# EAGLE board 555-pwm-eagle (EAGLE 5.07)
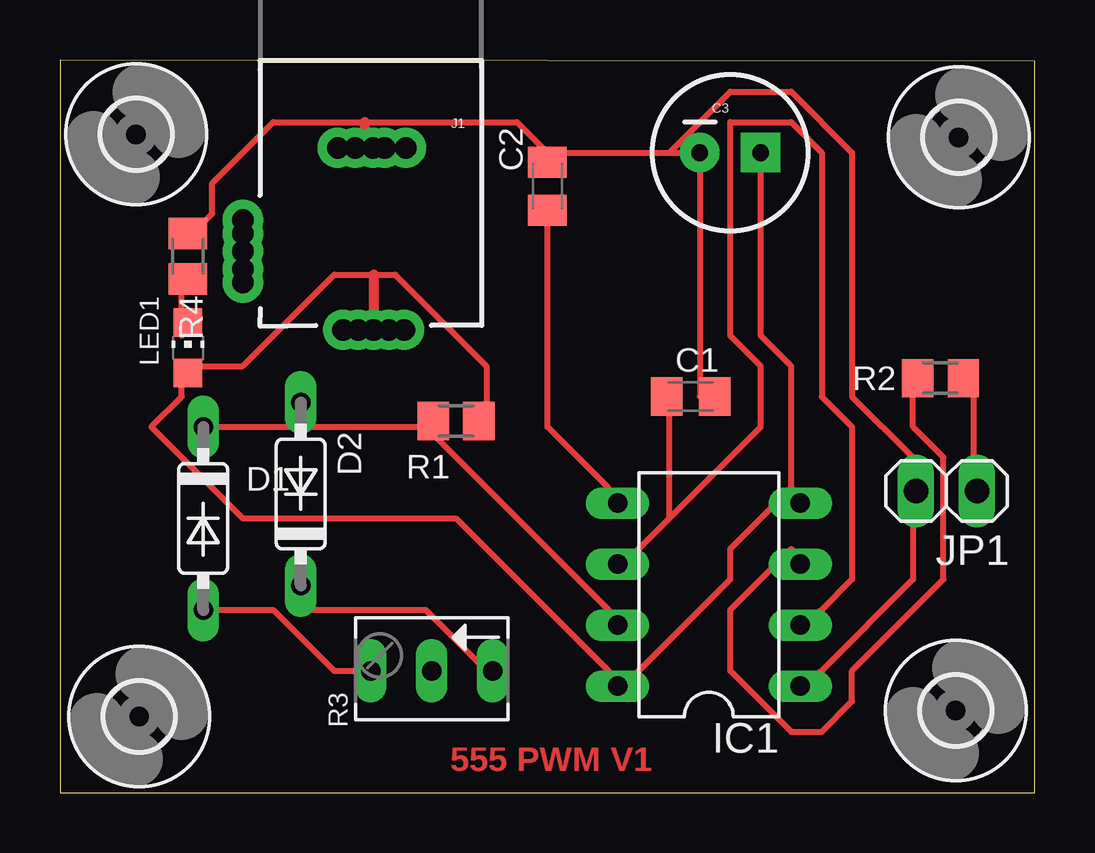
[diagram p0: board, top side]
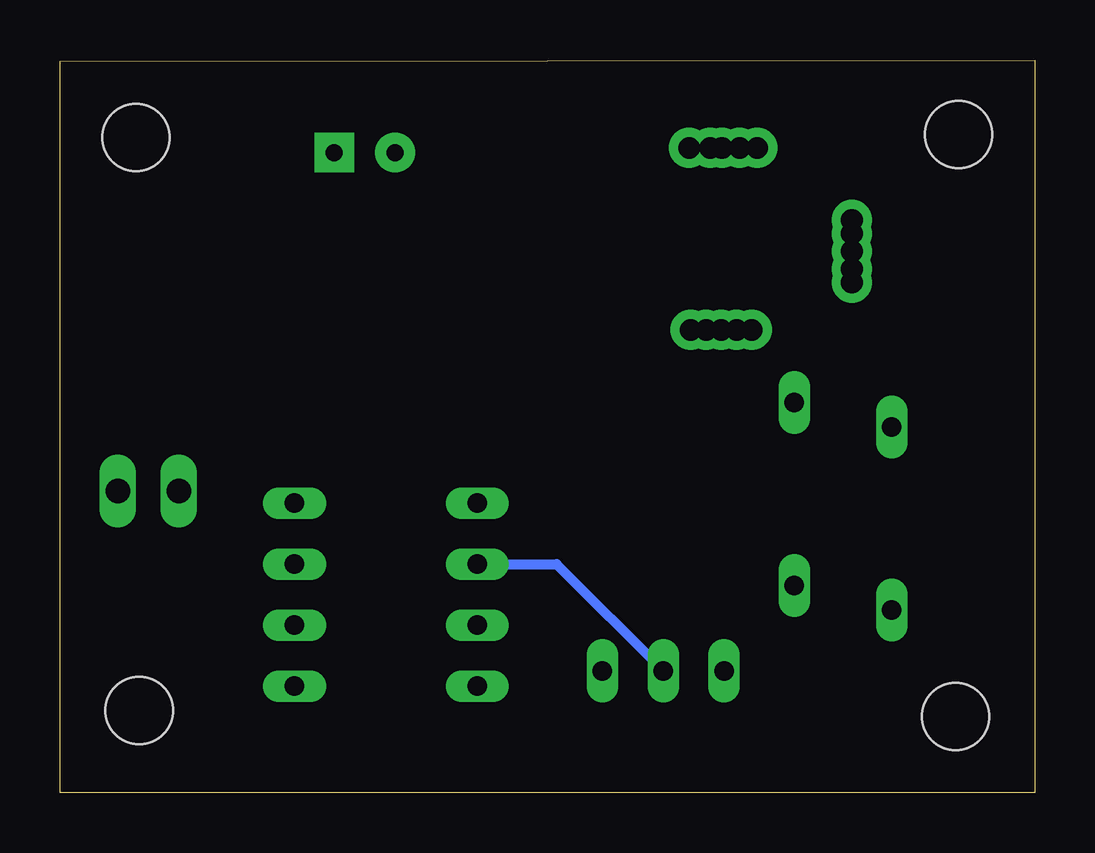
[diagram p1: board, bottom side, seen from below]

Size 40.64 x 30.53 mm. Coordinates in mm from the lower left corner, seen from the top.
Outline: 0,0 40.64,0 40.64,30.48 0,30.53 0,0
Copper layers (1*16): Top 0.035mm / dielectric 1.5mm / Bottom 0.035mm
Design rules "digital-toy": minimum track width 10mil, minimum drill 24mil, track to track 10mil, track to pad 10mil, pad to pad 10mil, via to via 10mil, smd to smd 10mil, copper to edge 40mil, drill to drill 10mil, minimum pad ring 10mil, minimum via ring 10mil, stop-mask expansion 4mil, vias tented up to drill 0mil, thermal gap 10mil

## Footprints (pad centres in the part's own frame; a part is rotated, then mirrored left to right if it is on the bottom)
C0805K = smd 1.3 x 1.6: 1 -1,0; 2 1,0
CPOL-RADIAL-100UF-25V = drill 0.7 pad 1.651 square: 1 1.27,0 | drill 0.7 pad 1.651 round: 2 -1.27,0
DO35-7 = drill 0.813 long: A 3.81,0; C -3.81,0
2,8 = hole 2.8: 0,0
DIL-08 = drill 0.813 long: 1 -3.81,-3.81; 2 -1.27,-3.81; 3 1.27,-3.81; 4 3.81,-3.81; 5 3.81,3.81; 6 1.27,3.81; 7 -1.27,3.81; 8 -3.81,3.81
POWER_JACK_2.1X5.5MM_BIG = drill 0.9 pad 1.676 round: $1GND -0.093,6.785; $1GND1 -0.578,6.785; $1GND2 -1.463,6.785; $1GND3 0.642,6.785; $1GND4 1.377,6.785; $1GNDBREAK 5.325,11.094; $1GNDBREAK1 5.325,11.829; $1GNDBREAK2 5.325,12.394; $1GNDBREAK3 5.325,10.359; $1GNDBREAK4 5.325,9.794; $2PWR -0.12,14.369; $2PWR1 -0.755,14.369; $2PWR2 -1.39,14.369; $2PWR6 0.515,14.369; $2PWR7 1.15,14.369 | drill 0.9 round: $2PWR3 0.515,14.369; $2PWR4 0.515,14.369; $2PWR5 0.515,14.369
1X02 = drill 1.016 long: 1 -1.27,0; 2 1.27,0
CHIP-LED0805 = smd 1.2 x 1.2: A 0,-1.05; C 0,1.05
M0805 = smd 1.3 x 1.6: 1 -0.95,0; 2 0.95,0
B64Y = drill 0.813 long: A 2.54,0; E -2.54,0; S 0,0

## Placement (x,y rotation side)
C1  0.1  [C0805K]  26.29,16.51 0 top
C2  0.01  [C0805K]  20.32,25.27 90 top
C3  470uf  [CPOL-RADIAL-100UF-25V]  27.94,26.67 0 top
D1  1N4148DO35-7  [DO35-7]  5.97,11.43 270 top
D2  1N4148DO35-7  [DO35-7]  10.03,12.45 90 top
H1  MOUNT-HOLE2.8  [2,8]  37.47,27.3 0 top
H2  MOUNT-HOLE2.8  [2,8]  3.3,3.17 0 top
H3  MOUNT-HOLE2.8  [2,8]  3.17,27.43 0 top
H4  MOUNT-HOLE2.8  [2,8]  37.34,3.43 0 top
IC1  NE555  [DIL-08]  27.05,8.26 90 top
J1  POWER_JACKPTH_SLOT  [POWER_JACK_2.1X5.5MM_BIG]  12.95,33.66 180 top
JP1  PWM  [1X02]  36.96,12.57 180 top
LED1  RED  [CHIP-LED0805]  5.33,18.54 0 top
R1  1k  [M0805]  16.51,15.49 180 top
R2  1k  [M0805]  36.7,17.27 0 top
R3  50k  [B64Y]  15.49,5.08 180 top
R4  500  [M0805]  5.33,22.35 270 top

## Library data of the parts
C1 C2 R1 R2 R4 = rcl
C3 = SparkFun
D1 D2 = diode
H1-H4 = holes
IC1 = st-microelectronics
J1 = digital-toy
JP1 = pinhead
LED1 = led
R3 = pot

## Nets
GND: C1.2 C2.2 C3.2 IC1.1 J1.$1GND JP1.2 R4.1
N$1: C1.1 IC1.2 IC1.6 R3.S
N$2: D1.C D2.A IC1.7 R1.2
N$4: LED1.C R4.2
N$5: JP1.1 R2.2
N$6: C2.1 IC1.5
N$7: D1.A R3.A
N$8: IC1.3 R2.1
N$9: D2.C R3.E
VCC+: C3.1 IC1.4 IC1.8 J1.$2PWR LED1.A R1.1

## Tracks (layer width: path | path; a pad name or v marks a point on that pad's centre or on a via)
GND
  Top 0.254: IC1.1 31.75,5.08 35.56,8.89 35.56,11.43 JP1.2 35.56,12.7 35.56,13.97 33.02,16.51 33.02,26.67 30.48,29.21 27.94,29.21 25.4,26.67 | C1.2 26.67,16.51 C3.2 25.4,26.67 | 20.32,26.67 19.05,27.94 12.7,27.94 8.89,27.94 6.35,25.4 6.35,24.13 5.08,22.86 R4.1 | 20.32,26.67 25.4,26.67 | 20.32,26.67 C2.2
  Top 0.406: J1.$1GND 12.7,26.52 12.7,27.94
N$1
  Top 0.254: 25.4,11.43 25.4,16.51 C1.1 | 25.4,11.43 24.13,10.16 IC1.6 | 25.4,11.43 29.21,15.24 29.21,17.78 27.94,19.05 27.94,27.94 30.48,27.94 31.75,26.67 31.75,16.51 33.02,15.24 33.02,8.89 31.75,7.62 IC1.2
  Bottom 0.406: IC1.6 19.94,9.53 R3.S
N$2
  Top 0.254: 10.16,15.24 15.24,15.24 | D1.C 10.16,15.24 | 10.16,15.24 D2.A | 15.24,15.24 22.86,7.62 IC1.7 | 15.24,15.24 R1.2
N$4
  Top 0.254: LED1.C 5.08,19.05 5.08,21.59 R4.2
N$5
  Top 0.254: R2.2 38.1,16.51 38.1,12.7 JP1.1
N$6
  Top 0.254: C2.1 20.32,15.24 22.86,12.7 IC1.5
N$7
  Top 0.254: D1.A 8.89,7.62 11.43,5.08 R3.A
N$8
  Top 0.254: R2.1 35.56,16.51 35.56,15.24 36.83,13.97 36.83,8.89 33.02,5.08 33.02,3.81 31.75,2.54 30.48,2.54 27.94,5.08 27.94,7.62 30.48,10.16 IC1.3
N$9
  Top 0.254: D2.C 10.16,7.62 15.24,7.62 17.78,5.08 R3.E
VCC+
  Top 0.254: 5.08,17.78 7.62,17.78 11.43,21.59 13.08,21.59 13.97,21.59 17.78,17.78 17.78,15.24 R1.1 | 30.48,12.7 27.94,10.16 27.94,8.89 24.13,5.08 IC1.8 22.86,5.08 16.51,11.43 7.62,11.43 3.81,15.24 5.08,16.51 5.08,17.78 | C3.1 29.21,19.05 30.48,17.78 30.48,12.7 | 30.48,12.7 IC1.4 | 5.08,17.78 LED1.A
  Top 0.406: 13.08,21.59 J1.$2PWR

## Text on the board
Top: 555 PWM V1